# Altium PCB oled_control.PcbDoc
Units mil, origin at the board's own origin, x right, y up, seen from the top; angles counter-clockwise.
Board outline 3158.9 x 1107.9 mil, 2 copper layers (Top Layer, Bottom Layer); 56 components, 41 nets, 225 pads, 54 vias.
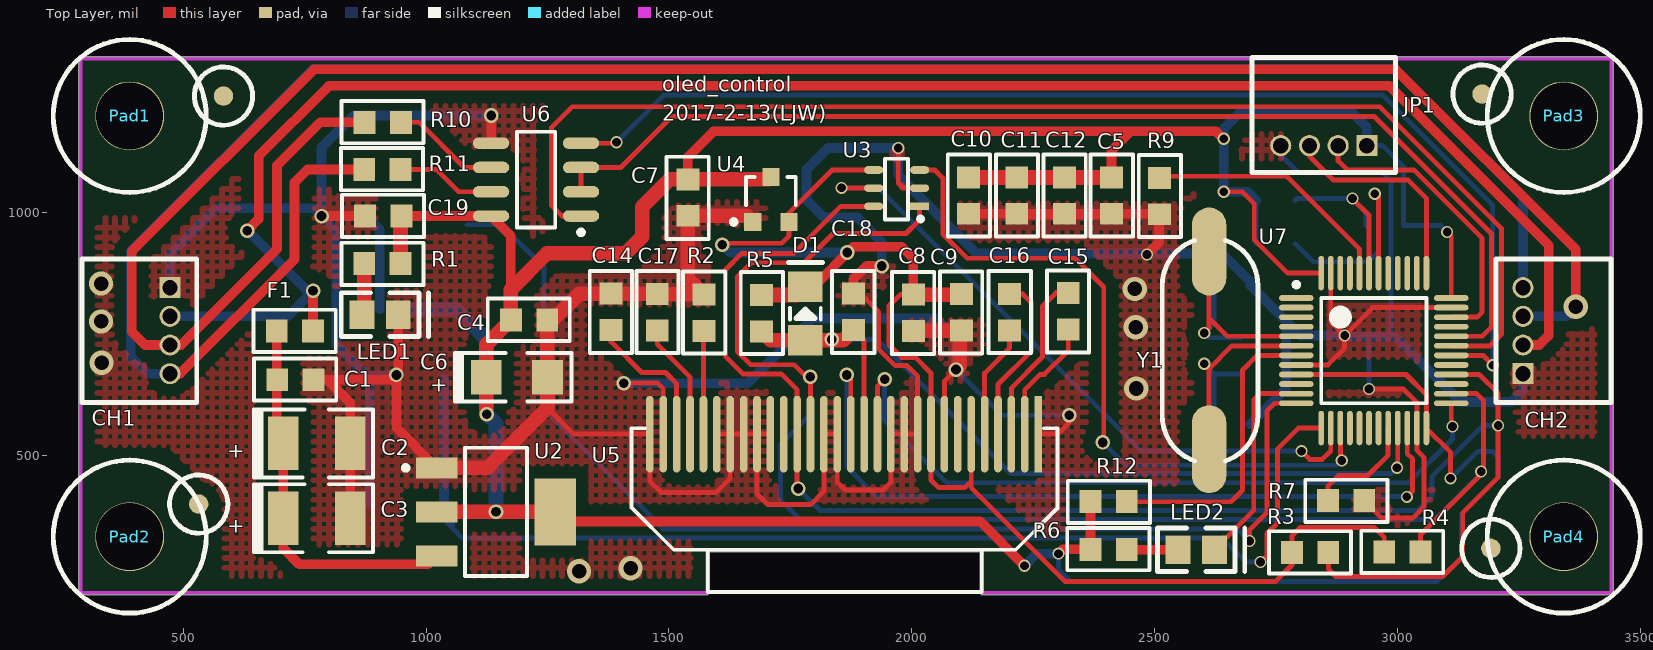
[diagram p0: Top Layer view]
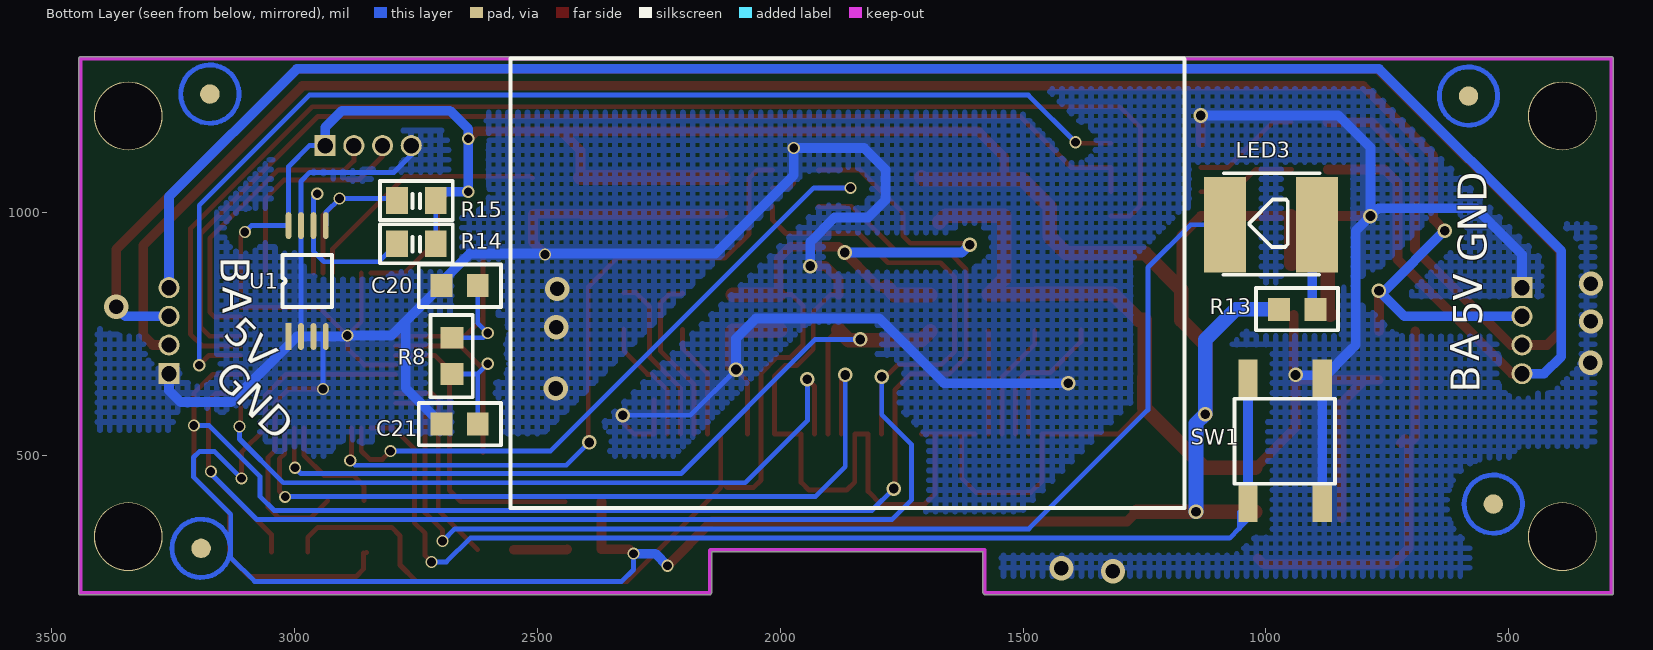
[diagram p1: Bottom Layer view, seen from below]

## Layer stack, top to bottom
Top Solder: solder mask 0.4, Solder Resist, Dk 3.5
Top Layer: signal copper 1.4
Dielectric 1: dielectric 12.6, FR-4, Dk 4.8
Bottom Layer: signal copper 1.4
Bottom Solder: solder mask 0.4, Solder Resist, Dk 3.5

## Board outline
289,212.05 1577,212.05 ccw(c1577,216) 1579.79,213.21 1581.79,215.21 ccw(c1579,218) 1582.95,218 1582.95,301.05 2141.05,301.05 2141.05,217 ccw(c2145,217) 2142.21,214.21 2143.21,213.21 ccw(c2146,216) 2146,212.05 3440,212.05 ccw(c3440,216) 3443.95,216 3443.95,1316 ccw(c3440,1316) 3440,1319.95 289,1319.95 ccw(c289,1316) 285.05,1316 285.05,216 ccw(c289,216)

## Design rules (kind name [scope] priority, off if disabled: settings)
Clearance Clearance_1 [InPolygon] p1: gap=25
Clearance [All] p2: gap=7
ComponentClearance [All] p1: gap=0 collisioncheckmode=3 verticalgap=0 showdistances=FALSE
PolygonConnect [All] p1: connectstyle=Direct reliefconductorwidth=10 reliefentries=4 polygonreliefangle="90 Angle" airgapwidth=10
RoutingVias [All] p1: holewidth=28 width=50 viastyle="Through Hole" minholewidth=28 minwidth=50 maxholewidth=28 maxwidth=50
SolderMaskExpansion [All] p1: expansion=4
Width [All] p1: maxlimit=100 minlimit=10 preferedwidth=100
28 further rules are at their usual default settings.

## Components (designator, comment, footprint, x,y, rotation, side; value= is the part's Value field where it differs from the comment)
C1 "Cap" 0805 731,655 r180 top
C2 "C_2200uF" "B: 3528" 775,524 r0 top
C3 "C_2200uF" "B: 3528" 775,370 r0 top
C4 "Cap" 0805 1212,778 r180 top
C5 "Cap" 0805 2411,1034 r90 top
C6 "Cap Pol3" "CAP A-3216" 1187,660 r0 top
C7 "Cap" 0805 1539,1030 r270 top
C8 "Cap" 0805 2003,793 r270 top
C9 "Cap" 0805 2102,794 r270 top
C10 "Cap" 0805 2117,1034 r90 top
C11 "Cap" 0805 2216,1034 r90 top
C12 "Cap" 0805 2314,1034 r90 top
C14 "Cap" 0805 1381,795 r270 top
C15 "Cap" 0805 2322,796 r270 top
C16 "Cap" 0805 2201,794 r90 top
C17 "Cap" 0805 1476,794 r90 top
C18 "Cap" 0805 1880,795 r270 top
C19 "Cap" 0805 912,992 r180 top
C20 "Cap" 0805 2660,849 r180 bottom
C21 "Cap" 0805 2660,564 r180 bottom
CH1 "HEADER1X4" CON4_1.5 473,756 r270 top
CH2 "HEADER1X4" CON4_1.5 3258,756 r90 top
D1 "Diode 1N4148" LL34 1781,736 r90 top
F1 "FUSE" 0805 730,755 r180 top
JP1 "4 HEADER" CON4_1.5 2848,1137 r180 top
LED1 "" LED-0805 868,789 r0 top
LED2 "" LED-0805 2548,305 r0 top
LED3 "" LED_5X5 895,974 r0 bottom
Pad1 "Pad" pad35 389,1198 r0 top
Pad2 "Pad" pad35 389,332 r0 top
Pad3 "Pad" pad35 3341,1198 r0 top
Pad4 "Pad" pad35 3341,332 r0 top
R1 "Res2" 0805 910,894 r0 top
R2 "Res2" 0805 1572,793 r90 top
R3 "Res2" 0805 2820,299 r180 top
R4 "Res2" 0805 3010,300 r180 top
R5 "Res2" 0805 1691,792 r90 top
R6 "Res2" 0805 2405,306 r180 top
R7 "Res2" 0805 2894,406 r0 top
R8 "Res2" 0805 2676,704 r270 bottom
R9 "Res2" 0805 2510,1033 r90 top
R10 "Res2" 0805 911,1185 r180 top
R11 "Res2" 0805 910,1088 r180 top
R12 "Res2" 0805 2405,404 r0 top
R13 "Res2" 0805 935.63,800 r0 bottom
R14 "Res2" C0805tan 2749,935 r180 bottom
R15 "Res2" C0805tan 2749,1024 r180 bottom
SW1 "SW-KEY-2" KEY_SOP4X4 932,496 r270 bottom
U1 "AT24c02" TSSOP8 3012,744 r90 bottom
U2 "AMS1117-3.3" SOT223 1144,383 r270 top
U3 "GT20L16S1Y" SOT23-6 2016,1012 r180 top
U4 "662K" SOT-23 1710,1026 r0 top
U5 "OLED_0.96_12864" OLED_1.30_12864 2260,543 r180 top
U6 "MAX3485CSA" NS08-L 1319,992 r180 top
U7 "STM32F103C8T6" LQFP48 2951,715 r0 top
Y1 "8MHz" XTAL_US1 2614,811 r270 top

## Footprints (in the part's own frame and the unit in brackets; to place one, negate y for a bottom-side part, rotate by r counter-clockwise, add the part's x,y. Pads: shape width x height; smd on the part's side, far side on the other; paste and mask are expansions set on the pad)
0805 [mm] "1.14mm,1.2mm,3.05mm"
  rect 1.14x1.2 smd: 1(-0.95,0) 2(0.95,0)
  silkscreen extent -2.13,-1.12 2.16,1.09
"B: 3528" [mm] "钽电容B型"
  rect 1.6x2.8 smd: 1(-1.75,0) 2(1.75,0)
  silkscreen extent -3.27,-1.78 2.95,1.78
C0805tan [mil]
  rect 45x55 smd: 1(-40,0) 2(40,0)
  silkscreen extent -75,-40 75,40
"CAP A-3216" [mm]
  rect 1.6x1.8 smd: 1(-1.6,0) 2(1.6,0)
  silkscreen extent -3.25,-1.27 2.85,1.27
CON4_1.5 [mm]
  rect 1.1x1.1 hole 0.8: 1(-2.25,0)
  round 1.1 hole 0.8: 2(-0.75,0) 3(0.75,0) 4(2.25,0)
  silkscreen extent -3.75,-4.6 3.75,1.4
KEY_SOP4X4 [mm]
  rect 2x1 smd: 1(-4.089,1.219) 1(2.412,1.219) 2(-4.089,-2.671) 2(2.412,-2.671)
  silkscreen extent -3.05,-3.38 1.4,1.88
LED-0805 [mm]
  rect 1.3x1.5 smd: 1(0,0) 2(1.9,0)
  silkscreen extent -1.08,-1.14 3.49,1.14
LED_5X5 [mm]
  rect 2.2x5 smd: 1(0,0) 2(4.801,0)
  silkscreen extent -0.13,-2.69 4.9,2.62
LL34 [mm]
  rect 1.6x1.8 smd: 1(0,0) 2(2.8,0)
  silkscreen extent 1.1,-0.89 4.07,0.89
LQFP48 [mm]
  oval 1.8x0.3 smd: 1(-4.05,2.75) 2(-4.05,2.25) 3(-4.05,1.75) 4(-4.05,1.25) 5(-4.05,0.75) 6(-4.05,0.25) 7(-4.05,-0.25) 8(-4.05,-0.75) 9(-4.05,-1.25) 10(-4.05,-1.75) 11(-4.05,-2.25) 12(-4.05,-2.75) 25(4.05,-2.75) 26(4.05,-2.25) 27(4.05,-1.75) 28(4.05,-1.25) 29(4.05,-0.75) 30(4.05,-0.25) 31(4.05,0.25) 32(4.05,0.75) 33(4.05,1.25) 34(4.05,1.75) 35(4.05,2.25) 36(4.05,2.75)
  oval 0.3x1.8 smd: 13(-2.75,-4.05) 14(-2.25,-4.05) 15(-1.75,-4.05) 16(-1.25,-4.05) 17(-0.75,-4.05) 18(-0.25,-4.05) 19(0.25,-4.05) 20(0.75,-4.05) 21(1.25,-4.05) 22(1.75,-4.05) 23(2.25,-4.05) 24(2.75,-4.05) 37(2.75,4.05) 38(2.25,4.05) 39(1.75,4.05) 40(1.25,4.05) 41(0.75,4.05) 42(0.25,4.05) 43(-0.25,4.05) 44(-0.75,4.05) 45(-1.25,4.05) 46(-1.75,4.05) 47(-2.25,4.05) 48(-2.75,4.05)
  silkscreen extent -4.17,-2.75 2.75,3.57, body extent -3.5,-3.5 3.5,3.5, height 1.6
NS08-L [mm] "SOIC, 8-Leads, Body 4.9x3.9mm, Pitch 1.27mm, IPC High Density"
  oval 1.9x0.6 smd: 1(0,0) 2(0,-1.27) 3(0,-2.54) 4(0,-3.81) 5(4.7,-3.81) 6(4.7,-2.54) 7(4.7,-1.27) 8(4.7,0)
  silkscreen extent -0.13,-4.41 3.35,0.97, body extent 0.4,-4.36 4.3,0.55, height 1.75
OLED_1.30_12864 [mm]
  rect 0.4x4 smd: 1(0,0)
  oval 0.4x4 smd: 2(0.7,0) 3(1.4,0) 4(2.1,0) 5(2.8,0) 6(3.5,0) 7(4.2,0) 8(4.9,0) 9(5.6,0) 10(6.3,0) 11(7,0) 12(7.7,0) 13(8.4,0) 14(9.1,0) 15(9.8,0) 16(10.5,0) 17(11.2,0) 18(11.9,0) 19(12.6,0) 20(13.3,0) 21(14,0) 22(14.7,0) 23(15.4,0) 24(16.1,0) 25(16.8,0) 26(17.5,0) 27(18.2,0) 28(18.9,0) 29(19.6,0) 30(20.3,0)
  silkscreen extent -1.02,-0.3 21.26,8.26
pad35 [mm]
  round 3.6 hole 3.5: 1(0.025,0)
  silkscreen extent -3.97,-4 4.03,4
SOT23-6 [mm]
  rect 1x0.4 smd: 1(0,0)
  oval 1x0.4 smd: 2(0,-0.95) 3(0,-1.9) 4(2.4,-1.9) 5(2.4,-0.95) 6(2.4,0)
  silkscreen extent -0.15,-2.49 1.8,0.76
SOT223 [mm] "SOT-223/SC-73; 4 Leads; Body 6.7 x 7.3 mm, inc. leads (LxW max)"
  rect 1.1x2.15 smd: 1(-2.3,-3.1) 2(0,-3.1) 3(2.3,-3.1)
  rect 3.5x2.15 smd: 4(0,3.1)
  silkscreen extent -3.35,-4.85 3.35,1.63
SOT-23 [mm]
  rect 0.9x0.95 smd: 1(-0.95,-1.175) 2(0.95,-1.175) 3(0,1.175)
  silkscreen extent -2.07,-1.3 1.3,1.18
TSSOP8 [mm]
  rect 1.4x0.3 smd: 1(0,0)
  oval 1.4x0.3 smd: 2(0,-0.65) 3(0,-1.3) 4(0,-1.95) 5(5.8,-1.95) 6(5.8,-1.3) 7(5.8,-0.65) 8(5.8,0)
  silkscreen extent 1.53,-2.28 4.27,0.33
XTAL_US1 [mil]
  oval 181.1x70.87 smd: 1(-108,-2) 2(299,-2)
  silkscreen extent -131,-98 323,98

## Part data
C1 C4 C5 C7 C8 C9 C10 C11 C12 C14 C15 C16 C17 C18 C19 C20 C21: "Capacitor"
C6: "Polarized Capacitor (Surface Mount)"
D1: "High Conductance Fast Diode"
JP1: "4 Pin Header"
LED1 LED2 LED3: library part LED2, "Typical RED, GREEN, YELLOW, AMBER GaAs LED"
R1 R2 R3 R4 R5 R6 R7 R8 R9 R10 R11 R12 R13 R14 R15: "Resistor"
U1: library part TI24c02
U2: library part AMS1117-5
U6: library part MAX485CSA
Y1: library part XTAL, "Crystal Oscillator"

## Free pads (board coordinates)
  round 40 smd: 0(532,399) 0(583,1239) 0(3174,1243) 0(3192,308)
  round 40 smd far side: 0(532,399) 0(583,1239) 0(3174,1243) 0(3192,308)
  round 120 on Top Solder: 1(532,399) 1(583,1239) 1(3174,1243) 1(3192,308)
  round 120 on Bottom Solder: 1(532,399) 1(583,1239) 1(3174,1243) 1(3192,308)

## Via types
v1: diameter 25, hole 18, Top Layer to Bottom Layer, 26 vias
v2: diameter 30, hole 20, Top Layer to Bottom Layer, 19 vias
v3: diameter 50, hole 30, Top Layer to Bottom Layer, 9 vias

## Nets (pads, with @x,y where several pads share a name; then routed paths per layer and width w, separated by ;. In a path a pad name is that pad's centre, name@x,y a point inside that pad or via, vN(x,y) a via of type N, cw(c..) or ccw(c..) an arc to the next point about the centre after c; other vN are vias at no path point)
485_A: CH1.3 CH2.3 R10.2 | length 4463.8
  Top Layer w20: R10.2 782,1185 693,1096 693,924 495.47,726.47 CH1.3 421.53,726.47 394,754 394,919 769,1294 2996,1294 3367,923 v3(3367,805)
  Bottom Layer w20: CH2.3 3347.53,785.53 v3(3367,805)
485_B: CH1.4 CH2.4 R11.2 | length 4296.8
  Top Layer w20: CH1.4 493.42,667.42 729,903 729,1061 756,1088 R11.2
  Bottom Layer w20: CH1.4 427.58,667.42 392,703 392,920 767.06,1295.06 2994.94,1295.06 3258,1032 CH2.4
+3.3V: C4.2 C5.2 C6.1 C7.1 C10.2 C11.2 C12.2 C19.1 JP1.1 R1.2 R6.2 R12.1 R13.2 R14.2 R15.2 U1.8 U2.2 U2.4 U4.3 U6.8 U7.9 U7.24 U7.36 U7.48 | length 8557.4
  Top Layer w10: v1(2642,1042) 2680,1042 2705,1017 2705,943 2773.55,874.45 U7.48 ; U7.9 3017.21,665.79 3059.27,623.73 U7.24 3109,505.82 v1(3109,452) ; v1@3099,962 v1(3102,959) 3110.45,950.55 U7.36
  Top Layer w20: C19.1 U6.8 1174.6,951.36 1174.6,840.6 ; U2.4 1286.05,363 2141,363 v1(2232,272) ; C7.1 1539,1114 1591.5,1166.5 2450.5,1166.5 ; v1(2302,297) 2311,306 R6.2 R12.1 ; C5.2 2411,1127 2450.5,1166.5 ; v1(2642,1151) 2626.5,1166.5 2450.5,1166.5
  Top Layer w30: R1.2 947.4,990 C19.1 ; U2.2 v2(1144,383) U2.4 ; v2(1125,584) 1124.01,584.99 C6.1 1124.01,727.41 C4.2 1174.6,840.6 1249,915 1411,915 1445,949 1445,1011 1501.4,1067.4 C7.1 1705.14,1067.4 U4.3 ; C10.2 C11.2 C12.2 C5.2
  Bottom Layer w10: v1(2302,297) 2302,264 2326,240 3082,240 3131,289 3131,378 3208,455 3208,495 3196,507 3164,507 v1(3109,452) ; R14.2 R15.2 ; JP1.1 2969,1137 3012,1094 U1.8 3088.65,972.35 v1(3102,959) ; 3252,308 ccw(c3192,308) 3252,308
  Bottom Layer w20: v1(2232,272) 2257,297 v1(2302,297) ; R15.2 2691,1042 v1(2642,1042) v1(2642,1151) 2642,1171 2680,1209 2902,1209 2936.58,1174.42 JP1.1
  Bottom Layer w30: R13.2 1062,800 1125,737 v2(1125,584) 1144,565 v2(1144,383)
+5V_IN: CH1.2 CH2.2 F1.1 | length 3850.8
  Top Layer w20: v2(632,962) 655.5,985.5 655.5,1115.5 800,1260 2983.11,1260 3311,932.11 3311,746 3291.47,726.47 CH2.2 ; F1.1 v2(767.4,838) 767.4,840.4 v2@768,841
  Bottom Layer w20: CH1.2 714.93,785.53 v2(767.4,838) 756,838 v2(632,962)
CLK: R4.1 U3.1 U5.18 U7.26 | length 3119.9
  Top Layer w10: v2@1787,657 1758,686 1668,686 1641,713 1641,867 1670,896 1778,896 1838,956 1988,956 2016,984 U3.1 ; v2(1791,661) 1791.5,660.5 U5.18 ; R4.1 3047.4,336.4 3177,466 3177,612 3162.58,626.42 U7.26
  Bottom Layer w10: v2(1791,661) 1791,583 1730,522 1730,407 1770,367 3077,367 3173,463 3177,463 3174,466 v1(3172,466)
CS1: U5.13 U7.25 | length 1538.2
  Top Layer w10: U5.13 1929.29,641.29 v2(1944,656) ; U7.25 3110.45,561.55 v1(3113,559)
  Bottom Layer w10: v2(1944,656) 1944,571 2072,443 3023,443 3113,533 v1(3113,559)
CS2: U3.3 U7.15 | length 1450.3
  Top Layer w10: U3.3 2047.2,1086.8 2064,1070 2064,955 2114,905 2336,905 2395,846 2395,528 v2(2393,526) ; U7.15 2882.1,491.9 v1(2885,489)
  Bottom Layer w10: v2(2393,526) 2440,479 2875,479 v1(2885,489)
D/C: U5.15 U7.22 | length 1681.3
  Top Layer w10: v2(1866,665) 1871,665 1874.17,661.83 U5.15 ; U7.22 3019.9,503.1 3031,492 3031,426 v1(3019,414) 3019,408 3020,407 v1@3023,410
  Bottom Layer w10: v2(1866,665) 1866,476 1927,415 3026,415 3019,408 v1(3019,414)
FSO: U3.5 U7.14 | length 1360.1
  Top Layer w10: v1(1855,1050) 1855.6,1049.4 U3.5 ; v1(2802,508) 2819,491 2845,491 2862.42,508.42 U7.14
  Bottom Layer w10: v1(1855,1050) 1931,1050 2473,508 v1(2802,508)
GND: C1.1 C2.2 C3.2 C4.1 C5.1 C6.2 C7.2 C8.2 C9.2 C10.1 C11.1 C12.1 C14.1 C17.2 C18.1 C19.2 C20.1 C21.1 CH1.1 CH2.1 JP1.4 LED1.2 R2.2 R7.2 R9.1 SW1.1 U1.1 U1.2 U1.3 U1.4 U1.7 U2.1 U3.2 U4.1 U5.1 U5.8 U5.10 U5.11 U5.12 U5.16 U5.17 U5.21 U5.22 U5.23 U5.24 U5.25 U5.29 U5.30 U6.5 U7.8 U7.23 U7.35 U7.47 | length 12388.5
  Top Layer w10: 1249.99,596.99 1303.98,543 U5.30 1460.79,446.21 1484,423 1597,423 1626.14,452.14 U5.24 ; v2(1407,648) 1477,648 1488.35,636.65 U5.29 ; U5.25 U5.24 ; U5.21 U5.22 ; C18.1@1880,830.4 1896.6,830.4 1932,795 1932,718 1966,684 1990,684 2011.97,662.03 U5.10 U5.11 U5.12 1956.85,443.85 1941,428 1863,428 1846.61,444.39 U5.16 U5.17 1819.05,425.05 1792,398 1704,398 1681.26,420.74 U5.22 ; v1(1972,1132) 1972,1060 1982.6,1049.4 U3.2 ; U5.8 2067.09,652.09 v2(2091,676) ; U5.1@2260,613 U5.1 2300,543 2324,567 v2(2324,582) ; U7.8 2856.47,685.47 2891,720 v1(2891,746) ; U7.47 2862.42,774.58 v1(2891,746) ; R7.2 2966.4,371 3032,371 3054,393 3054,495.48 3039.58,509.9 U7.23 3039.58,608.42 3012,636 v1(2941,636) ; U7.35 2948.58,803.58 v1(2891,746) ; U5.24 U5.23 U5.22
  Top Layer w20: C1.1 797,655 ; v2(785,992) C19.2 ; C3.2 C2.2 843.9,608.1 797,655 ; LED1.2 942.8,668.8 v2(939,665) ; U2.1 939,556.5 v2(939,665) ; U6.5 v2(1134,1199) v2(1134,1199) ; C18.1@1880,830.4 C18.1 1880,862 1907,889 v2(1938,889) ; C10.1 C11.1 C12.1 C5.1 2509,996.6 2509,938 v1(2484,913) ; C11.1@2211,994.6 C5.1@2408,994.6 ; 797,655 929,655 v2(939,665)
  Top Layer w30: U2.1 1126.55,473.55 1249.99,596.99 C6.2 1249.4,660.59 C4.1 1261,778 1315.4,832.4 C14.1 1475,832.4 C17.2 1571,831.4 1539,863.4 C7.2 1659.74,992.6 U4.1 ; C8.2@2000,756.6 C8.2@2003,756.6 ; C8.2 2098,755.6 2099,754.6 2099,684 v2(2091,676)
  Bottom Layer w10: v2(2091,676) 2185,582 v2(2324,582) ; JP1.4 2759.42,1117.58 2795,1082 2968,1082 2986.41,1063.59 U1.7 U1.2 ; U1.4 2941,738.23 v1(2941,636)
  Bottom Layer w20: CH1.1 473,913 568,1008 769,1008 v2(785,992) ; SW1.1@884,401.04 884,657 825.81,715.19 825.81,715.82 ; v2(939,665) 938,664 877.63,664 825.81,715.82 ; v2(1134,1199) 851,1199 785,1133 v2(785,992) ; v2(1407,648) 1663,648 1796,781 2050,781 2091,740 v2(2091,676) ; v2(1938,889) 1938,939 1888,989 1819,989 1783,1025 1783,1088 1827,1132 v1(1972,1132) 1972,1076 2133,915 2639,915 2697.4,856.6 C20.1 2771,775.4 ; C21.1 2771,637.6 2771,775.4 ; CH2.1 3258,633 3234,609 3130,609 2995,744 U1.2 U1.3 U1.4 2893,744 v1(2891,746) 2800.4,746 2771,775.4 ; v2(785,992) 815,962 815,726.63 825.81,715.82
  other v3: 1315,261 1421,267 2462,637 332,690 2461,763 331,775 2459,842 331,853
LED1: LED2.2 U7.11 | length 435.3
  Top Layer w10: LED2.2 2704,386.2 2704,614 2716.42,626.42 U7.11
LED2: LED3.2 U7.12 | length 2402.3
  Top Layer w10: v1(2695,323) 2695,345 2731,381 2731,591 2746.73,606.73 U7.12
  Bottom Layer w10: LED3.2 1155,974 1243,886 1243,593 1488,348 2670,348 v1(2695,323)
MOSI: R3.1 U3.6 U5.19 U7.28 | length 3286.8
  Top Layer w10: v2(1766,431) 1763.94,433.06 U5.19 1763.94,634.06 1731,667 1652,667 1617,702 1617,882 1650,915 1757,915 1854,1012 U3.6 ; R3.1@2851.4,299 R3.1@2851.4,300 ; R3.1 2857.4,265.6 2873,250 3093,250 3134,291 3134,381 3207,454 v1(3207,561) 3207,627 3168.21,665.79 U7.28
  Bottom Layer w10: v2(1766,431) 1811,386 3042,386 3071,415 3071,456 3176,561 v1(3207,561)
NetC1_2: C1.2 C2.1 C3.1 F1.2 U2.3 | length 793
  Top Layer w20: F1.2 692.6,537.5 C2.1 C3.1 706.1,307.9 739,275 1004.5,275 U2.3@1016.4,286.9 ; C2.1@714,533.1 C2.1@722.1,525
NetC14_2: C14.2 U5.28 | length 299.2
  Top Layer w10: C14.2 1381,733 1444,670 1493,670 1515.9,647.1 U5.28
NetC15_1: C15.1 U5.3 | length 355
  Top Layer w10: U5.3 2204.88,637.88 2269,702 2269,806.4 2297,834.4 2321,834.4 C15.1
NetC15_2: C15.2 U5.2 | length 259
  Top Layer w10: U5.2 2232.44,634.44 2264,666 2273,666 2322,715 C15.2 C15.2@2322,759.6
NetC16_1: C16.1 U5.5 | length 236.8
  Top Layer w10: U5.5 2149.76,668.76 2201,720 C16.1 C16.1@2201,758.6
NetC16_2: C16.2 U5.4 | length 352.5
  Top Layer w10: U5.4 2177.32,645.32 2246,714 2246,814 2228.6,831.4 2203,831.4 C16.2@2201,833.4
NetC17_1: C17.1 U5.27 | length 241.5
  Top Layer w10: C17.1 1476,728 1543.46,660.54 U5.27
NetC20_2: C20.2 R8.1 U7.5 Y1.1 | length 544.7
  Top Layer w10: v1(2602,751) 2612,761 2612,782 ; Y1.1@2612,912 2612,782 ; U7.5 2649.47,744.53 2612,782
  Bottom Layer w10: C20.2 2622.6,771.6 v1(2602,751) 2611.6,741.4 R8.1
NetC21_2: C21.2 R8.2 U7.6 Y1.2 | length 573.4
  Top Layer w10: v1@2601,688 v1(2602,688) 2612,678 ; Y1.2@2612,505 Y1.2 2612,678 ; U7.6 2658.84,724.84 2612,678
  Bottom Layer w10: v1(2602,688) 2622.6,667.4 ; C21.2 2622.6,667.4 ; R8.2 2623.4,666.6 2622.6,667.4
NetLED1_1: LED1.1 R1.1 | length 106.9
  Top Layer w30: LED1.1 872.6,793.6 R1.1
NetLED2_1: LED2.1 R6.1 | length 106
  Top Layer w20: R6.1@2438.4,306 R6.1@2439.4,305 ; R6.1@2443.4,305 LED2.1
NetLED3_1: LED3.1 R13.1 | length 178
  Bottom Layer w20: LED3.1 904.6,964.4 R13.1@904.6,800
NetR2_1: R2.1 U5.26 | length 213
  Top Layer w10: U5.26 1571.02,754.62 R2.1
NetR7_1: R7.1 U7.20 | length 236
  Top Layer w10: R7.1 2856.6,435.6 2879,458 2939,458 2980.53,499.53 U7.20
NetR9_2: R9.2 U7.44 | length 525
  Top Layer w10: R9.2 2513.6,1074 2772,1074 2921.47,924.53 U7.44
NetR10_1: R10.1 U6.6 | length 224.1
  Top Layer w10: R10.1 986,1185 1079,1092 U6.6
NetR11_1: R11.1 U6.7 | length 205.6
  Top Layer w10: R11.1 1021,1088 1067,1042 U6.7
NetR12_2: R12.2 U7.7 | length 618.6
  Top Layer w10: R12.2 2657,404 2681,428 2681,675 2711.16,705.16 U7.7
NetSW1_2: SW1.2 U7.13 | length 2396.3
  Top Layer w10: v1(2718,280) 2731,293 2731,339 2753,361 2753,513 2795.55,555.55 U7.13
  Bottom Layer w10: SW1.2@1037.17,401.04 1037.17,366.67 1054.8,349.04 ; SW1.2@1054.8,383.41 1054.8,349.04 ; v1(2718,280) 2687,280 2638,329 1074.83,329 1054.8,349.04
  Bottom Layer w20: SW1.2@1037.17,401.04 SW1.2@1037.17,657
PA9_USART1_TX: U6.4 U7.30 | length 2434.9
  Top Layer w10: U6.4 1390,1142 v1(1392,1144) ; U7.30 3175.84,705.16 v1(3196,685)
  Bottom Layer w10: v1(1392,1144) 1489,1241 2969,1241 3196,1014 v1(3196,685)
PA10_USART1_RX: U6.1 U7.31 | length 2638.4
  Top Layer w10: U6.1 1280,992 1258,1014 1258,1174 1301,1217 2963,1217 3214,966 3214,749 3189.84,724.84 U7.31
PA11_RE485: U6.2 U6.3 U7.32 | length 2350.5
  Top Layer w10: U6.2 U6.3 1401,1092 1506,1197 2952,1197 3193,956 3193,763 3174.53,744.53 U7.32
PB6_SCL: R14.1 U1.6 U7.42 | length 484.4
  Top Layer w10: v1(2953,1038) 2960.84,1030.16 U7.42
  Bottom Layer w10: R14.1 2826,898 2939,898 2960.82,919.82 U1.6 2960.82,1030.18 v1(2953,1038)
PB7_SDA: R15.1 U1.5 U7.43 | length 354.7
  Top Layer w10: v1(2907,1028) 2941.16,993.84 U7.43
  Bottom Layer w10: R15.1 2793,1028 v1(2907,1028) 2935.23,999.77 U1.5
RES: C18.2 D1.1 R5.1 U5.14 U7.21 | length 1798.8
  Top Layer w10: C18.2 1901.73,735.87 U5.14 ; v1(2999,474) 3000.21,475.21 U7.21
  Top Layer w30: R5.1 1709.6,736 D1.1 1858.4,736 C18.2
  Bottom Layer w10: v2@1838,741 v2(1835,738) 1928,738 2204,462 2987,462 v1(2999,474)
TCK/SWCLK: JP1.3 U7.37 | length 452.5
  Top Layer w10: JP1.3 2818.47,1115.53 2868,1066 3022,1066 3059.27,1028.73 U7.37
TMS/SWDIO: JP1.2 U7.34 | length 613.8
  Top Layer w10: JP1.2 2877.53,1105.47 2896,1087 3033,1087 3174,946 3174,794 3163.9,783.9 U7.34
VCC_OLED: C8.1 C9.1 D1.2 R3.2 R4.2 R5.2 U3.4 U4.2 U5.6 U5.9 | length 2924.7
  Top Layer w10: v2(1610,933) 1613,936 1732,936 1747.4,951.4 U4.2 1747.4,998.4 1835.8,1086.8 U3.4 ; C8.1 1976.4,830.4 1953,807 1953,727 1979,701 2007,701 2039.53,668.47 U5.9 2039.53,448.47 2055,433 2109,433 2122.2,446.2 ; U5.6 2122.2,446.2 ; R4.2 2972.6,330.4 2952,351 2800,351 2782.6,333.6 R3.2 2782.6,273.6 2749,240 2315,240 2122.2,432.8 2122.2,446.2
  Top Layer w20: D1.2 1797.24,846.24 1880,929 1979,929 2003,905 C8.1
  Top Layer w30: R5.2 1764.17,829.4 D1.2 ; C8.1 C9.1@2098,830.4
  Bottom Layer w20: v2(1610,933) 1626,917 v2(1867,917)
pads on no net: Pad1.1 Pad2.1 Pad3.1 Pad4.1 U5.7 U5.20 U7.1 U7.2 U7.3 U7.4 U7.10 U7.16 U7.17 U7.18 U7.19 U7.27 U7.29 U7.33 U7.38 U7.39 U7.40 U7.41 U7.45 U7.46
copper on no net: | length 1131
  Bottom Layer w10: 592,399 ccw(c532,399) 592,399 ; 643,1239 ccw(c583,1239) 643,1239 ; 3234,1243 ccw(c3174,1243) 3234,1243

## Polygon pours and split planes (outlines as drawn)
GND on Top Layer "Top Layer-No Net" (hatched 90Degree grid 20 track 12, remove dead copper, pour order 2): 470,1316 472,1318 3126,1318 3126,1149 3186,1089 3283,992 3409,992 3436,992 3440,988 3436,984 3436,539 3248,539 3200,491 3149,440 3149,241 3149,239 3124,214 3120,210 2157,210 2145.95,210 2141.98,213.97 2144,216 2144,305 1587,305 1574,292 1573,291 1573,216 587,216 585,218 585,352 585,407 480,512 472,520 294,520 294,974 296,976 292,980 292,988 466,988 484,1006 573,1095 573,1197 573,1305 593,1325
GND on Bottom Layer "Top Layer-No Net" (hatched 90Degree grid 20 track 12, remove dead copper, pour order 3): 573,1312 575,1310 3124,1310 3124,1150 3136,1138 3294,980 3305,980 3450,980 3434,964 3434,551 3246,551 3227,532 3124,429 3124,422 3124,240 3142,222 3135.49,215.49 2141.35,215.49 2141.35,300.75 2141.05,301.05 2137.09,305 1579,305 1579,222 1573,216 581,216 581,399 589,407 478,518 474,518 314,518 300,532 302,534 302,976 480,976 484,980 579,1075 579,1084 579,1300 591,1312

## Keep-outs
Keep-Out Layer:
  lines w7.87: 1579,229 1579,218 ; 1579,218 1577,216 1573,216 289,216 289,1316 1140,1316 3440,1316 3440,216 2146,216 2145,217 2145,304 2144,305 1579,305 1579,218

## Silkscreen, mask and mechanical layers (free items; w line width, h text height)
Top Overlay:
  circle w10: c3174,1243 r60
  circle w10: c3192,308 r60
  circle w10: c532,399 r60
  circle w10: c583,1239 r60
  text "oled_control" at 1486,1248 h31.5
  text "2017-2-13(LJW)" at 1486,1188 h31.5
Bottom Overlay:
  text "B" at 3152,908 h59.06 r90
  text "GND" at 545,897 h59.06 r270
  text "A" at 3147,846 h59.06 r90
  text "5V" at 555,766 h59.06 r270
  text "5V" at 3149,748 h59.06 r45
  text "A" at 561,693 h59.06 r270
  text "GND" at 3168,657 h59.06 r45
  text "B" at 560,628 h59.06 r270

## Text inside footprints (layer, text, board x,y; h text height)
C2: Top Overlay "+" at 591.1,494 h31.5
C3: Top Overlay "+" at 591.1,340 h31.5
C6: Top Overlay "+" at 1009.01,630 h31.5